# Altium PCB PCB1.PcbDoc (part 3 of 4)
Units mm, origin at the board's own origin, x right, y up, seen from the top; angles counter-clockwise.
Board outline 120 x 70 mm, 6 copper layers (SIG TOP, GND1, PWR, SIG, GND2, SIG BOT), stack 1.538 mm thick; 355 components, 304 nets, 1156 pads, 166 vias.
Unrouted connection lines stored in the file: 534.
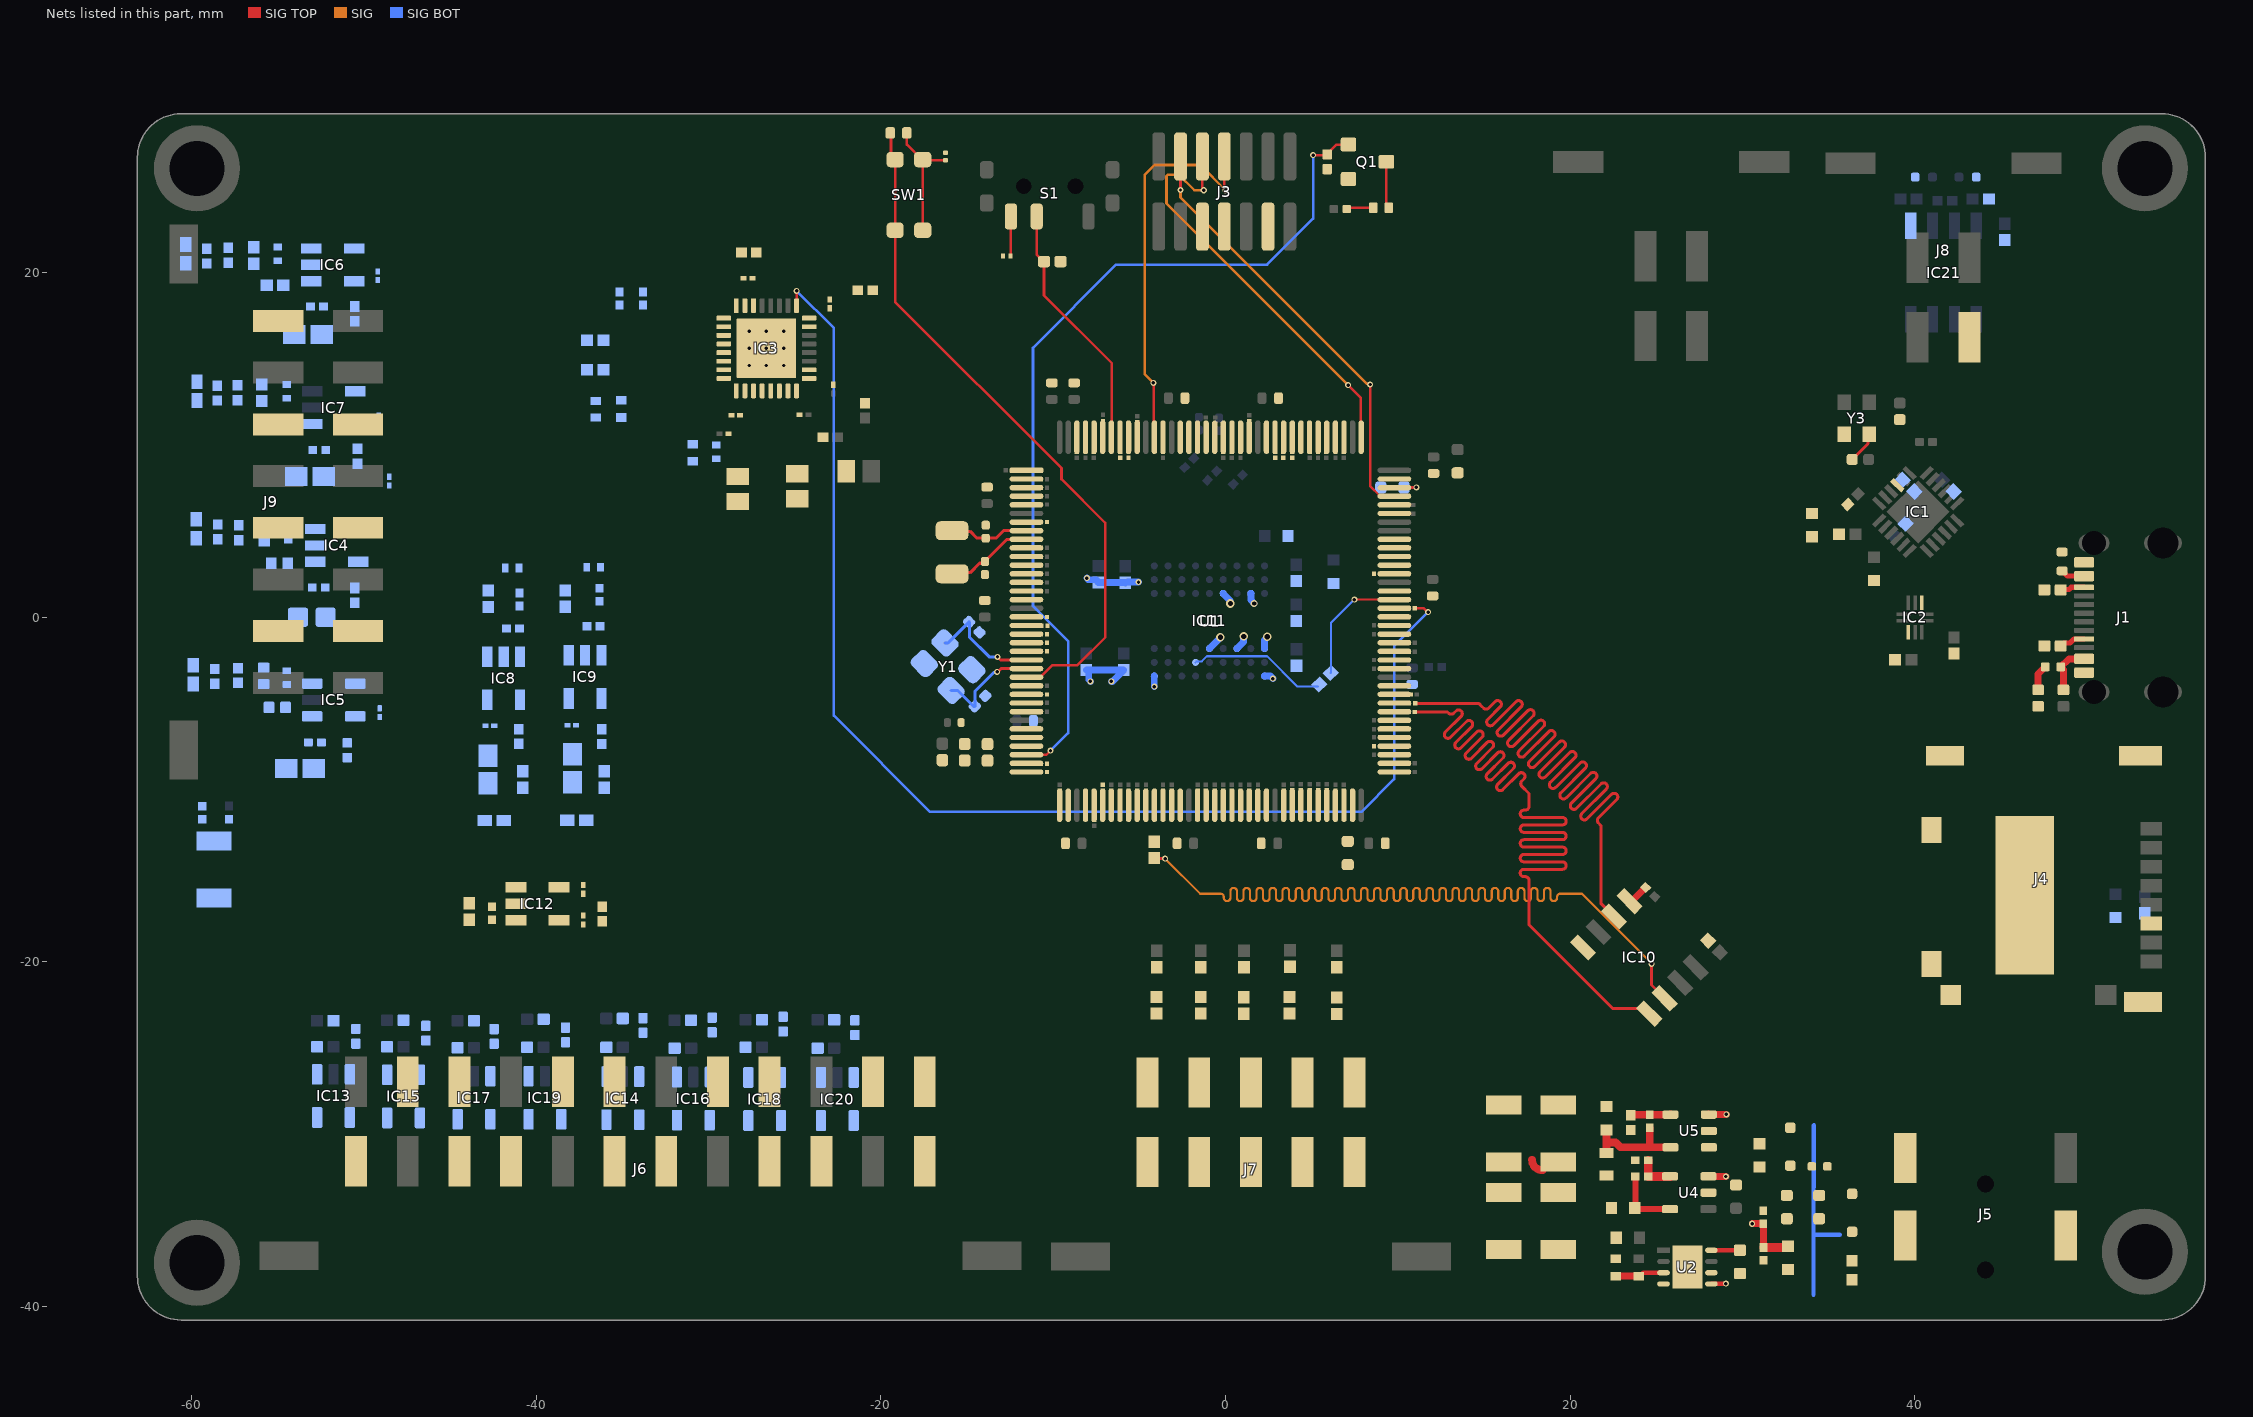
[diagram p5: the nets of this part, all layers, seen from the top]

## Via types
v1: diameter 0.35, hole 0.2, SIG TOP to SIG BOT, tented both sides, 131 vias
v2: diameter 0.5, hole 0.3, SIG TOP to SIG BOT, tented both sides, 22 vias
v3: diameter 0.5, hole 0.2, SIG TOP to SIG BOT, 9 vias
v4: diameter 0.5, hole 0.25, SIG TOP to SIG BOT, tented both sides, 1 vias
v5: diameter 0.4, hole 0.25, SIG TOP to SIG BOT, tented both sides, 1 vias
v6: diameter 0.35, hole 0.2, SIG TOP to SIG BOT, 1 vias
v7: diameter 0.4, hole 0.2, SIG TOP to SIG BOT, tented both sides, 1 vias

## Nets (pads, with @x,y where several pads share a name; then routed paths per layer and width w, separated by ;. In a path a pad name is that pad's centre, name@x,y a point inside that pad or via, vN(x,y) a via of type N, cw(c..) or ccw(c..) an arc to the next point about the centre after c; other vN are vias at no path point) (continued)
Pot2_Wiper: IC15.3 J6.5
Pot3_Filtered: C118.1 NT44.1 R66.2
Pot3_Wiper: IC17.3 J6.8
Pot4_Filtered: C111.1 NT48.1 R63.2
Pot4_Wiper: IC14.3 J6.11
Pot5_Filtered: C115.1 NT51.1 R65.2
Pot5_Wiper: IC16.3 J6.14
Pot6_Filtered: C119.1 NT52.1 R67.2
Pot6_Wiper: IC18.3 J6.17
Pot7_Filtered: C122.1 NT53.1 R70.2
Pot7_Wiper: IC19.3 J6.20
Pot8_Filtered: C123.1 NT54.1 R71.2
Pot8_Wiper: IC20.3 J6.23
QSPI.QSPI_IO1: IC10.2 NT4.1 | length 65.6
  SIG TOP w0.175: NT4.1@10.998,-5.004 14.681,-5.004 14.897,-5.22 14.959,-5.282 ccw(c15.111,-5.13) 15.262,-5.282 15.635,-4.909 cw(c15.786,-5.061) 15.938,-4.909 cw(c15.786,-5.061) 15.938,-5.213 15.207,-5.943 ccw(c15.359,-6.095) 15.207,-6.247 ccw(c15.359,-6.095) 15.511,-6.247 16.848,-4.909 cw(c17,-5.061) 17.151,-4.909 cw(c17,-5.061) 17.151,-5.213 15.814,-6.55 ccw(c15.966,-6.702) 15.814,-6.853 ccw(c15.966,-6.702) 16.117,-6.853 17.536,-5.435 cw(c17.688,-5.586) 17.839,-5.435 cw(c17.688,-5.586) 17.839,-5.738 16.421,-7.157 ccw(c16.572,-7.308) 16.421,-7.46 ccw(c16.572,-7.308) 16.724,-7.46 18.143,-6.041 cw(c18.294,-6.193) 18.446,-6.041 cw(c18.294,-6.193) 18.446,-6.345 17.027,-7.763 ccw(c17.179,-7.915) 17.027,-8.067 ccw(c17.179,-7.915) 17.331,-8.067 18.749,-6.648 cw(c18.901,-6.8) 19.053,-6.648 cw(c18.901,-6.8) 19.053,-6.951 17.634,-8.37 ccw(c17.786,-8.522) 17.634,-8.673 ccw(c17.786,-8.522) 17.937,-8.673 19.356,-7.255 cw(c19.508,-7.406) 19.659,-7.255 cw(c19.508,-7.406) 19.659,-7.558 18.241,-8.977 ccw(c18.393,-9.128) 18.241,-9.28 ccw(c18.393,-9.128) 18.544,-9.28 19.963,-7.862 cw(c20.114,-8.013) 20.266,-7.862 cw(c20.114,-8.013) 20.266,-8.165 18.848,-9.583 ccw(c18.999,-9.735) 18.848,-9.887 ccw(c18.999,-9.735) 19.151,-9.887 20.569,-8.468 cw(c20.721,-8.62) 20.873,-8.468 cw(c20.721,-8.62) 20.873,-8.772 19.454,-10.19 ccw(c19.606,-10.342) 19.454,-10.494 ccw(c19.606,-10.342) 19.758,-10.494 21.176,-9.075 cw(c21.328,-9.227) 21.48,-9.075 cw(c21.328,-9.227) 21.48,-9.378 20.061,-10.797 ccw(c20.213,-10.949) 20.061,-11.1 ccw(c20.213,-10.949) 20.364,-11.1 21.783,-9.682 cw(c21.935,-9.833) 22.086,-9.682 cw(c21.935,-9.833) 22.086,-9.985 20.668,-11.404 ccw(c20.819,-11.555) 20.668,-11.707 ccw(c20.819,-11.555) 20.971,-11.707 22.39,-10.288 cw(c22.541,-10.44) 22.693,-10.288 cw(c22.541,-10.44) 22.693,-10.592 21.633,-11.652 ccw(c21.784,-11.804) 21.633,-11.955 21.768,-12.09 21.768,-12.395 21.768,-16.612 IC10.2@22.538,-17.381
QSPI_CLK: IC10.6 R68.1 | length 64.4
  SIG TOP w0.171: v1(24.714,-20.117) 24.714,-21.354 IC10.6@25.475,-22.115
  SIG TOP w0.175: R68.1@-4.14,-13.988 -4.107,-14.021 v1(-3.513,-14.021)
  SIG w0.125: v1(-3.513,-14.021) -1.481,-16.053 -0.737,-16.053 -0.295,-16.053 cw(c-0.295,-16.242) -0.105,-16.242 -0.105,-16.292 ccw(c0.084,-16.292) 0.084,-16.482 ccw(c0.084,-16.292) 0.274,-16.292 0.274,-15.906 cw(c0.463,-15.906) 0.463,-15.716 cw(c0.463,-15.906) 0.653,-15.906 0.653,-16.292 ccw(c0.842,-16.292) 0.842,-16.482 ccw(c0.842,-16.292) 1.032,-16.292 1.032,-15.906 cw(c1.222,-15.906) 1.222,-15.716 cw(c1.222,-15.906) 1.411,-15.906 1.411,-16.292 ccw(c1.601,-16.292) 1.601,-16.482 ccw(c1.601,-16.292) 1.79,-16.292 1.79,-15.906 cw(c1.98,-15.906) 1.98,-15.716 cw(c1.98,-15.906) 2.169,-15.906 2.169,-16.292 ccw(c2.359,-16.292) 2.359,-16.482 ccw(c2.359,-16.292) 2.549,-16.292 2.549,-15.906 cw(c2.738,-15.906) 2.738,-15.716 cw(c2.738,-15.906) 2.928,-15.906 2.928,-16.292 ccw(c3.117,-16.292) 3.117,-16.482 ccw(c3.117,-16.292) 3.307,-16.292 3.307,-15.906 cw(c3.496,-15.906) 3.496,-15.716 cw(c3.496,-15.906) 3.686,-15.906 3.686,-16.292 ccw(c3.875,-16.292) 3.875,-16.482 ccw(c3.875,-16.292) 4.065,-16.292 4.065,-15.906 cw(c4.255,-15.906) 4.255,-15.716 cw(c4.255,-15.906) 4.444,-15.906 4.444,-16.292 ccw(c4.634,-16.292) 4.634,-16.482 ccw(c4.634,-16.292) 4.823,-16.292 4.823,-15.906 cw(c5.013,-15.906) 5.013,-15.716 cw(c5.013,-15.906) 5.202,-15.906 5.202,-16.292 ccw(c5.392,-16.292) 5.392,-16.482 ccw(c5.392,-16.292) 5.582,-16.292 5.582,-15.906 cw(c5.771,-15.906) 5.771,-15.716 cw(c5.771,-15.906) 5.961,-15.906 5.961,-16.292 ccw(c6.15,-16.292) 6.15,-16.482 ccw(c6.15,-16.292) 6.34,-16.292 6.34,-15.906 cw(c6.529,-15.906) 6.529,-15.716 cw(c6.529,-15.906) 6.719,-15.906 6.719,-16.292 ccw(c6.908,-16.292) 6.908,-16.482 ccw(c6.908,-16.292) 7.098,-16.292 7.098,-15.906 cw(c7.288,-15.906) 7.288,-15.716 cw(c7.288,-15.906) 7.477,-15.906 7.477,-16.292 ccw(c7.667,-16.292) 7.667,-16.482 ccw(c7.667,-16.292) 7.856,-16.292 7.856,-15.906 cw(c8.046,-15.906) 8.046,-15.716 cw(c8.046,-15.906) 8.235,-15.906 8.235,-16.292 ccw(c8.425,-16.292) 8.425,-16.482 ccw(c8.425,-16.292) 8.614,-16.292 8.614,-15.906 cw(c8.804,-15.906) 8.804,-15.716 cw(c8.804,-15.906) 8.994,-15.906 8.994,-16.292 ccw(c9.183,-16.292) 9.183,-16.482 ccw(c9.183,-16.292) 9.373,-16.292 9.373,-15.906 cw(c9.562,-15.906) 9.562,-15.716 cw(c9.562,-15.906) 9.752,-15.906 9.752,-16.292 ccw(c9.941,-16.292) 9.941,-16.482 ccw(c9.941,-16.292) 10.131,-16.292 10.131,-15.906 cw(c10.321,-15.906) 10.321,-15.716 cw(c10.321,-15.906) 10.51,-15.906 10.51,-16.292 ccw(c10.7,-16.292) 10.7,-16.482 ccw(c10.7,-16.292) 10.889,-16.292 10.889,-15.906 cw(c11.079,-15.906) 11.079,-15.716 cw(c11.079,-15.906) 11.268,-15.906 11.268,-16.292 ccw(c11.458,-16.292) 11.458,-16.482 ccw(c11.458,-16.292) 11.647,-16.292 11.647,-15.906 cw(c11.837,-15.906) 11.837,-15.716 cw(c11.837,-15.906) 12.027,-15.906 12.027,-16.292 ccw(c12.216,-16.292) 12.216,-16.482 ccw(c12.216,-16.292) 12.406,-16.292 12.406,-15.906 cw(c12.595,-15.906) 12.595,-15.716 cw(c12.595,-15.906) 12.785,-15.906 12.785,-16.292 ccw(c12.974,-16.292) 12.974,-16.482 ccw(c12.974,-16.292) 13.164,-16.292 13.164,-15.906 cw(c13.354,-15.906) 13.354,-15.716 cw(c13.354,-15.906) 13.543,-15.906 13.543,-16.292 ccw(c13.733,-16.292) 13.733,-16.482 ccw(c13.733,-16.292) 13.922,-16.292 13.922,-15.906 cw(c14.112,-15.906) 14.112,-15.716 cw(c14.112,-15.906) 14.301,-15.906 14.301,-16.292 ccw(c14.491,-16.292) 14.491,-16.482 ccw(c14.491,-16.292) 14.68,-16.292 14.68,-15.906 cw(c14.87,-15.906) 14.87,-15.716 cw(c14.87,-15.906) 15.06,-15.906 15.06,-16.292 ccw(c15.249,-16.292) 15.249,-16.482 ccw(c15.249,-16.292) 15.439,-16.292 15.439,-15.906 cw(c15.628,-15.906) 15.628,-15.716 cw(c15.628,-15.906) 15.818,-15.906 15.818,-16.292 ccw(c16.007,-16.292) 16.007,-16.482 ccw(c16.007,-16.292) 16.197,-16.292 16.197,-15.906 cw(c16.387,-15.906) 16.387,-15.716 cw(c16.387,-15.906) 16.576,-15.906 16.576,-16.292 ccw(c16.766,-16.292) 16.766,-16.482 ccw(c16.766,-16.292) 16.955,-16.292 16.955,-15.906 cw(c17.145,-15.906) 17.145,-15.716 cw(c17.145,-15.906) 17.334,-15.906 17.334,-16.292 ccw(c17.524,-16.292) 17.524,-16.482 ccw(c17.524,-16.292) 17.713,-16.292 17.713,-15.906 cw(c17.903,-15.906) 17.903,-15.716 cw(c17.903,-15.906) 18.093,-15.906 18.093,-16.292 ccw(c18.282,-16.292) 18.282,-16.482 ccw(c18.282,-16.292) 18.472,-16.292 18.472,-15.906 cw(c18.661,-15.906) 18.661,-15.716 cw(c18.661,-15.906) 18.851,-15.906 18.851,-16.292 ccw(c19.04,-16.292) 19.04,-16.482 ccw(c19.04,-16.292) 19.23,-16.292 19.23,-16.242 cw(c19.419,-16.242) 19.419,-16.053 19.837,-16.053 20.676,-16.053 v1@24.714,-20.091
QSPI_IO0: IC10.5 NT1.1 | length 65.2
  SIG TOP w0.175: NT1.1@10.973,-5.512 12.878,-5.512 12.94,-5.574 ccw(c13.091,-5.422) 13.243,-5.574 13.365,-5.452 cw(c13.517,-5.603) 13.668,-5.452 cw(c13.517,-5.603) 13.668,-5.755 12.751,-6.673 ccw(c12.902,-6.824) 12.751,-6.976 ccw(c12.902,-6.824) 13.054,-6.976 13.972,-6.058 cw(c14.123,-6.21) 14.275,-6.058 cw(c14.123,-6.21) 14.275,-6.362 13.357,-7.279 ccw(c13.509,-7.431) 13.357,-7.583 ccw(c13.509,-7.431) 13.661,-7.583 14.578,-6.665 cw(c14.73,-6.817) 14.882,-6.665 cw(c14.73,-6.817) 14.882,-6.969 13.964,-7.886 ccw(c14.116,-8.038) 13.964,-8.189 ccw(c14.116,-8.038) 14.267,-8.189 15.185,-7.272 cw(c15.337,-7.424) 15.488,-7.272 cw(c15.337,-7.424) 15.488,-7.575 14.571,-8.493 ccw(c14.722,-8.644) 14.571,-8.796 ccw(c14.722,-8.644) 14.874,-8.796 15.792,-7.879 cw(c15.943,-8.03) 16.095,-7.879 cw(c15.943,-8.03) 16.095,-8.182 15.178,-9.099 ccw(c15.329,-9.251) 15.178,-9.403 ccw(c15.329,-9.251) 15.481,-9.403 16.398,-8.485 cw(c16.55,-8.637) 16.702,-8.485 cw(c16.55,-8.637) 16.702,-8.789 15.784,-9.706 ccw(c15.936,-9.858) 15.784,-10.01 ccw(c15.936,-9.858) 16.088,-10.01 17.005,-9.092 cw(c17.157,-9.244) 17.308,-9.092 cw(c17.157,-9.244) 17.308,-9.395 17.187,-9.517 ccw(c17.338,-9.669) 17.187,-9.821 17.602,-10.236 17.602,-10.315 17.602,-10.989 cw(c17.388,-10.989) 17.388,-11.204 17.309,-11.204 ccw(c17.309,-11.418) 17.309,-11.633 19.547,-11.633 cw(c19.547,-11.847) 19.547,-12.062 17.309,-12.062 ccw(c17.309,-12.276) 17.309,-12.491 19.547,-12.491 cw(c19.547,-12.705) 19.547,-12.92 17.309,-12.92 ccw(c17.309,-13.134) 17.309,-13.349 19.547,-13.349 cw(c19.547,-13.563) 19.547,-13.778 17.309,-13.778 ccw(c17.309,-13.992) 17.309,-14.207 19.547,-14.207 cw(c19.547,-14.421) 19.547,-14.636 17.309,-14.636 ccw(c17.309,-14.85) 17.309,-15.065 17.388,-15.065 cw(c17.388,-15.279) 17.602,-15.279 17.602,-15.367 17.602,-17.856 22.449,-22.703 24.268,-22.703 IC10.5@24.577,-23.013